# Altium PCB TDS-Meter_v1.0.PcbDoc
Units mil, origin at the board's own origin, x right, y up, seen from the top; angles counter-clockwise.
Board outline 2110 x 1060 mil, 2 copper layers (Top Layer, Bottom Layer); 33 components, 22 nets, 99 pads, 8 vias.
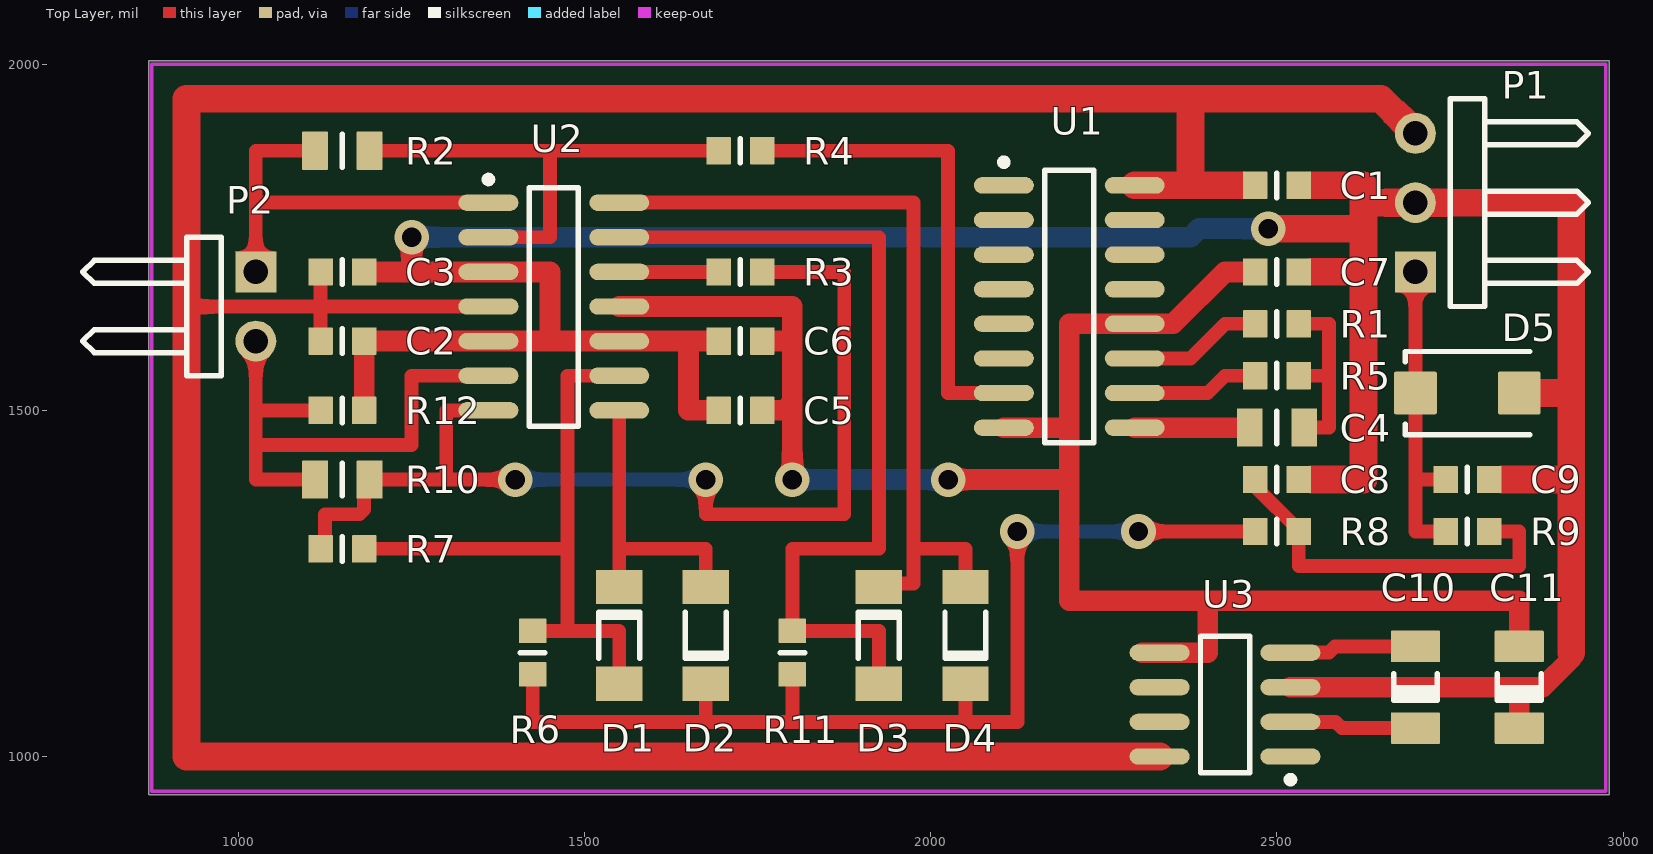
[diagram p0: Top Layer view]
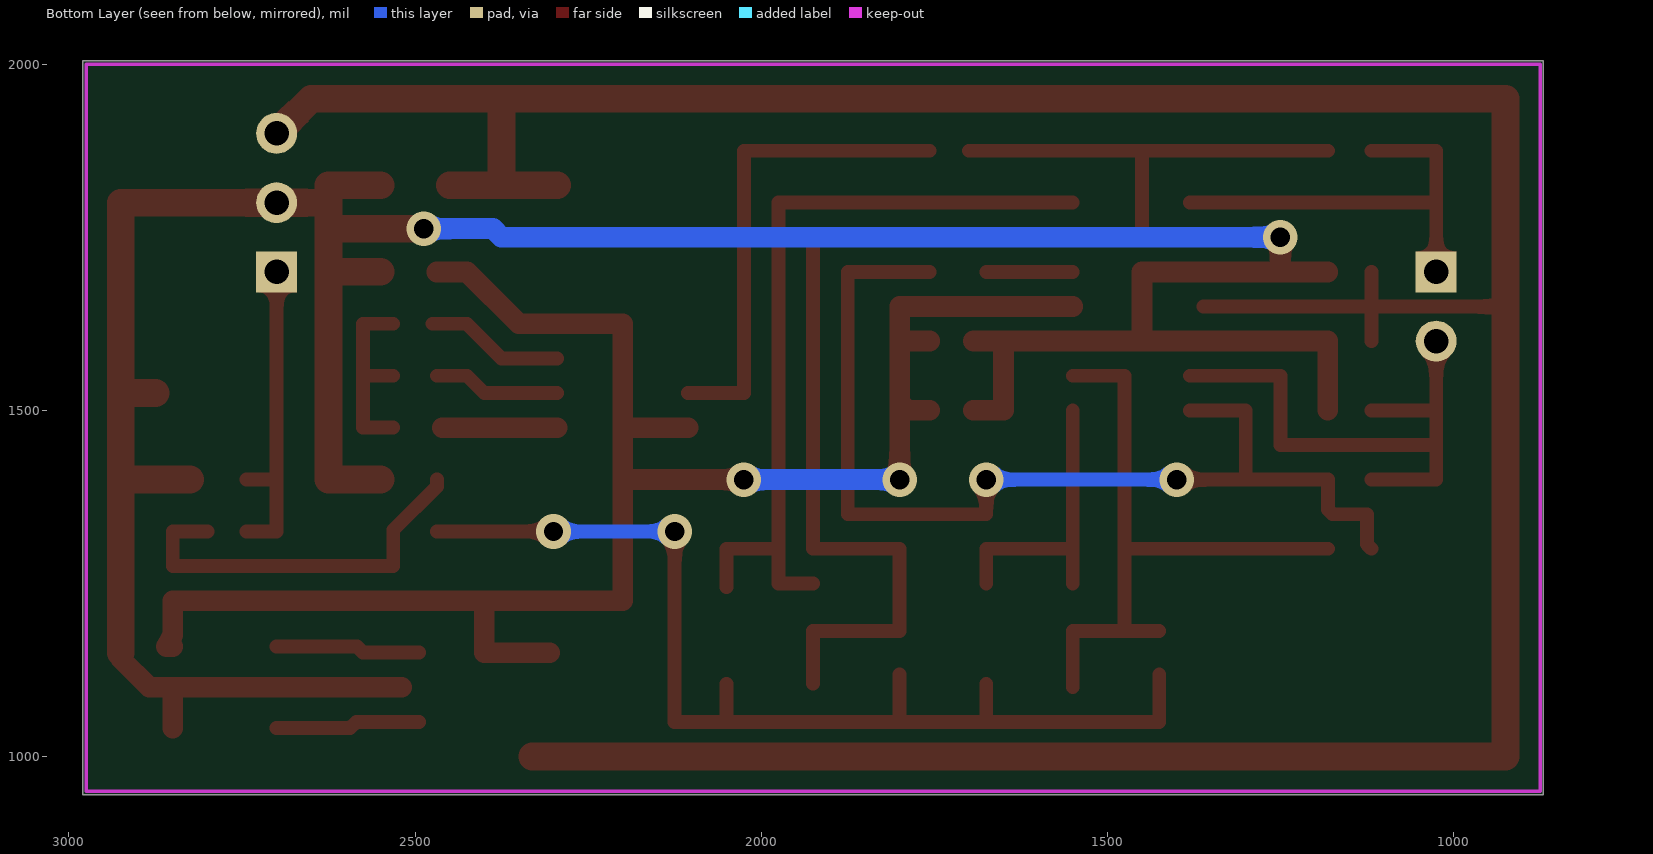
[diagram p1: Bottom Layer view, seen from below]
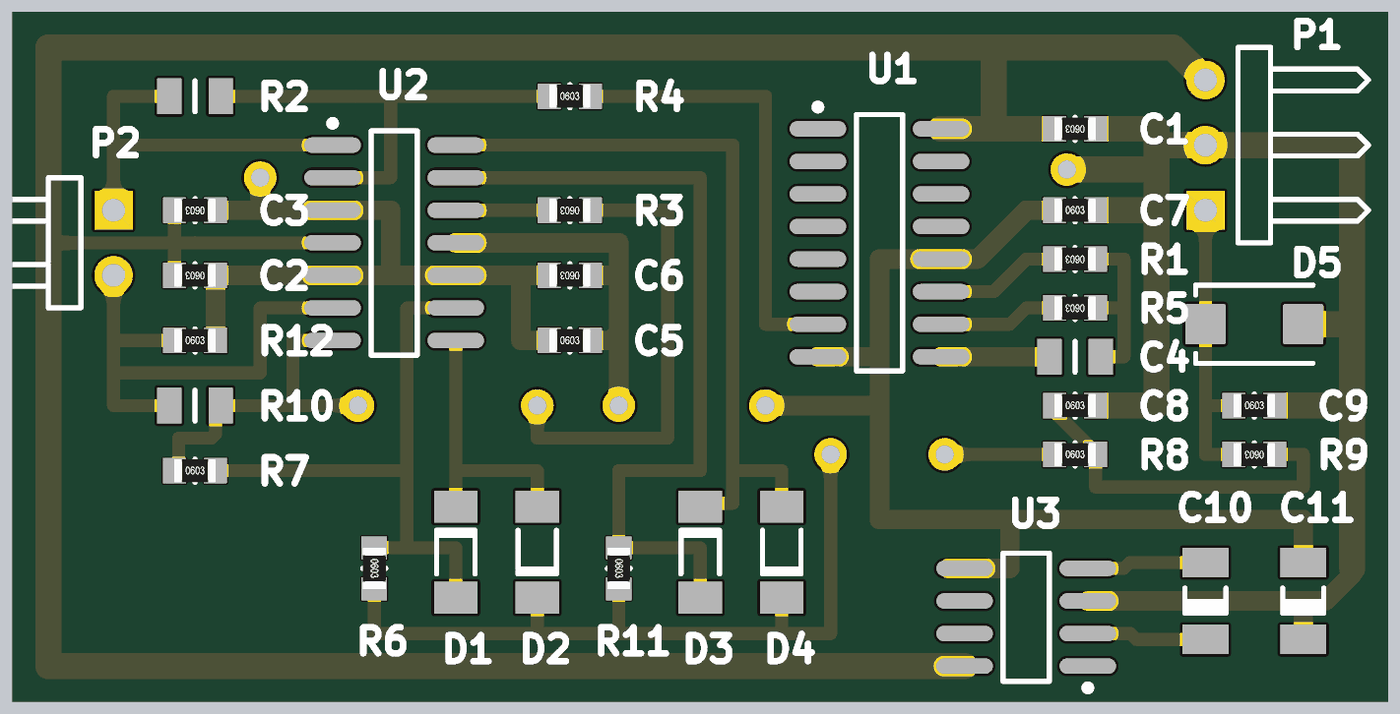
[diagram p2: 3D render of the assembled board from above, using the file's embedded part models]

## Layer stack, top to bottom
Top Solder: solder mask 0.4, Solder Resist, Dk 3.5
Top Layer: signal copper 1.4
Dielectric 1: dielectric 12.6, FR-4, Dk 4.8
Bottom Layer: signal copper 1.4
Bottom Solder: solder mask 0.4, Solder Resist, Dk 3.5

## Board outline
870,945 870,2005 2980,2005 2980,945

## Design rules (kind name [scope] priority, off if disabled: settings)
Clearance [All] p1: gap=10 ignorepadtopadclearanceinfootprint=FALSE except(0: Arc-Hole Track-Hole SMDPad-Hole THPad-Hole Via-Hole Fill-Hole Poly-Hole Region-Hole Text-Hole)
ComponentClearance [InComponent('No Component') vs InComponent('No Component')] p1: gap=10 collisioncheckmode=3 verticalgap=10 showdistances=FALSE
PolygonConnect [All] p1: connectstyle=Relief reliefconductorwidth=10 reliefentries=4 polygonreliefangle="90 Angle" airgapwidth=10
RoutingVias [All] p1: holewidth=28 width=50 viastyle="Through Hole" minholewidth=28 minwidth=50 maxholewidth=28 maxwidth=50
SolderMaskExpansion [All] p1: expansion=4
Width [All] p1: maxlimit=60 minlimit=10 preferedwidth=20
29 further rules are at their usual default settings.

## Components (designator, comment, footprint, x,y, rotation, side; value= is the part's Value field where it differs from the comment)
C1 "0.1uF" 0603 2500,1825 r180 top
C2 "4.7uF" 0603 1150,1600 r180 top
C3 "0.1uF" 0603 1150,1700 r180 top
C4 "1nF" 0805 2500,1475 r180 top
C5 "0.1uF" 0603 1725,1500 r0 top
C6 "4.7uF" 0603 1725,1600 r180 top
C7 "0.1uF" 0603 2500,1700 r0 top
C8 "1uF" 0603 2500,1400 r0 top
C9 "1uF" 0603 2775,1400 r0 top
C10 "10uF" CAPC3216x130N 2700,1100 r90 top
C11 "10uF" CAPC3216x130N 2850,1100 r90 top
D1 "DL4148" SOD80C 1550,1175 r90 top
D2 "DL4148" SOD80C 1675,1175 r270 top
D3 "DL4148" SOD80C 1925,1175 r90 top
D4 "DL4148" SOD80C 2050,1175 r270 top
D5 "¡¡DES!!" "DO214AC (SMA)" 2775,1525 r0 top value=B340A7otro
P1 "Header 3H" HDR1X3H 2700,1700 r90 top
P2 "Header 2H" HDR1X2H 1025,1700 r270 top
R1 "100K" 0603 2500,1625 r180 top
R2 "6.8K" 0805 1150,1875 r0 top
R3 "10K" 0603 1725,1700 r180 top
R4 "100K" 0603 1725,1875 r0 top
R5 "10K" 0603 2500,1550 r180 top
R6 "10K" 0603 1425,1150 r270 top
R7 "10K" 0603 1150,1300 r0 top
R8 "10K" 0603 2500,1325 r0 top
R9 "10K" 0603 2775,1325 r180 top
R10 "5.6K" 0805 1150,1400 r0 top
R11 "10K" 0603 1800,1150 r270 top
R12 "1M" 0603 1150,1500 r0 top
U1 "CD4060BM" SO-16_N 2200,1650 r0 top
U2 "LMV324" SO-14_N 1455.51,1625 r0 top
U3 "ICL7660" SO8_N 2425,1075 r180 top

## Footprints (in the part's own frame and the unit in brackets; to place one, negate y for a bottom-side part, rotate by r counter-clockwise, add the part's x,y. Pads: shape width x height; smd on the part's side, far side on the other; paste and mask are expansions set on the pad)
0603 [mm]
  rrect5% 0.9x1 smd mask+0.051: 1(-0.8,0) 2(0.8,0)
  silkscreen extent 0,-0.45 0,0.45, body extent -0.85,-0.48 0.85,0.48, height 0.55
0805 [mm]
  rrect5% 0.95x1.4 smd: 1(-1,0) 2(1,0)
  silkscreen extent 0,-0.6 0,0.6, body extent -1.07,-0.7 1.07,0.7, height 0.6
CAPC3216x130N [mm] "Chip Capacitor, Body 3.2x1.6mm, IPC Medium Density"
  rrect5% 1.15x1.8 smd: 1(-1.5,0) 2(1.5,0)
  silkscreen extent -0.48,-0.8 0.5,0.8, body extent -1.7,-0.9 1.7,0.9, height 1.3
"DO214AC (SMA)" [mil] "Molded Diode, 2-Leads, SMA"
  rrect10% 62x62 smd: 1(75,0) 2(-75,0)
  silkscreen extent -90,-60 90,60, body extent -90,-60 90,60, height 103
HDR1X2H [mm] "Connector; Header; 2 Position; Right Angle"
  rect 1.5x1.5 hole 0.9: 1(0,0)
  round 1.5 hole 0.9: 2(2.54,0)
  silkscreen extent -1.27,-6.35 3.81,-1.27
HDR1X3H [mm] "Connector; Header; 3 Position; Right Angle"
  rect 1.5x1.5 hole 0.9: 1(0,0)
  round 1.5 hole 0.9: 2(2.54,0) 3(5.08,0)
  silkscreen extent -1.27,-6.35 6.35,-1.27
SO8_N [mm] "SOIC, 8-Leads, Body 4.9x3.9mm, Pitch 1.27mm, IPC Medium Density"
  oval 2.2x0.6 smd: 1(-2.4,1.905) 2(-2.4,0.635) 3(-2.4,-0.635) 4(-2.4,-1.905) 5(2.4,-1.905) 6(2.4,-0.635) 7(2.4,0.635) 8(2.4,1.905)
  silkscreen extent -2.53,-2.5 0.9,2.88, body extent -2,-2.5 2,2.5, height 1.75
SO-14_N [mm] "SOIC, 16-Leads, Body 9.9x3.9mm, Pitch 1.27mm, IPC Medium Density"
  oval 2.2x0.6 smd: 1(-2.4,4.445) 2(-2.4,3.175) 3(-2.4,1.905) 4(-2.4,0.635) 5(-2.4,-0.635) 6(-2.4,-1.905) 7(-2.4,-3.175) 8(2.4,-3.175) 9(2.4,-1.905) 10(2.4,-0.635) 11(2.4,0.635) 12(2.4,1.905) 13(2.4,3.175) 14(2.4,4.445)
  silkscreen extent -2.52,-3.75 0.9,5.42, body extent -2,-3.75 2,5, height 1.75
SO-16_N [mm] "SOIC, 16-Leads, Body 9.9x3.9mm, Pitch 1.27mm, IPC Medium Density"
  oval 2.2x0.6 smd: 1(-2.4,4.445) 2(-2.4,3.175) 3(-2.4,1.905) 4(-2.4,0.635) 5(-2.4,-0.635) 6(-2.4,-1.905) 7(-2.4,-3.175) 8(-2.4,-4.445) 9(2.4,-4.445) 10(2.4,-3.175) 11(2.4,-1.905) 12(2.4,-0.635) 13(2.4,0.635) 14(2.4,1.905) 15(2.4,3.175) 16(2.4,4.445)
  silkscreen extent -2.52,-5 0.9,5.42, body extent -2,-5 2,5, height 1.75
SOD80C [mm] "Metal Electrode Face (MELF) Diode; Body 3.5 x 1.6 mm (LxDia)"
  rect 1.25x1.7 smd: 1(-1.775,0) 2(1.775,0)
  silkscreen extent -0.85,-0.75 0.85,0.75

## Part data
C1 C2 C3 C4 C5 C6 C8 C9: library part Cap, "Cap", Package=0603, Tolerance=±10%, Voltage-Rated=6.3V
C7: library part Cap, "Cap", Package=0603, Tolerance=±10%, Voltage-Rated=50V
C10 C11: library part "Cap Pol", "Cap", Current="90 mARMS", Manufacturer=Panasonic, MfgPartNum=EEE-FC1H220P, Package="8mm dia.", Tolerance=±10%, Voltage-Rated=50V, 3rdMfgr="Vishay / MAL214097103E3"
D1 D2 D3 D4: "Smal signal diode"
D5: library part B340A, "SURFACE MOUNT SCHOTTKY BARRIER RECTIFIER 1N5829. Pueden ir varios de los de sech", Package="DO214AA (SMB)", Voltage-Rated=40V
P1: "Header, 3-Pin, Right Angle", LatestRevisionDate=17-Jul-2002, LatestRevisionNote="Re-released for DXP Platform.", Publisher="Altium Limited"
P2: "Header, 2-Pin, Right Angle", LatestRevisionDate=17-Jul-2002, LatestRevisionNote="Re-released for DXP Platform.", Publisher="Altium Limited"
R1 R2 R3 R4 R5 R6 R7 R8 R9 R10 R11 R12: library part Res, "Resistor", Package=0603, Tolerance=1%
U1: library part CD4060, "IC Counter Binary Counter Element Bit Negative Edge 16-SOIC"
U2: "General Purpose Amplifier Circuit Rail-to-Rail 14-SOIC"
U3: "CMOS Voltage Converters, from positive to negative for an input range of +1.5V to +10.0V"

## Via types
v1: diameter 50, hole 28, Top Layer to Bottom Layer, 8 vias

## Nets (pads, with @x,y where several pads share a name; then routed paths per layer and width w, separated by ;. In a path a pad name is that pad's centre, name@x,y a point inside that pad or via, vN(x,y) a via of type N, cw(c..) or ccw(c..) an arc to the next point about the centre after c; other vN are vias at no path point)
+3.3v: C1.2 C2.2 C3.2 P1.3 U1.16 U2.4 U3.8 | length 4968.1
  Top Layer w20: 925,1650 1118.5,1650 ; C2.2 1118.5,1650 ; C3.2 1118.5,1650 ; 1150.24,1650.24 1150,1650 ; U2.4 1150,1650 ; 1118.5,1650 1150,1650
  Top Layer w40: U1.16 2375,1825 ; U3.8 925,1000 925,1650 925,1950 2375,1950 ; 2450,1825 2375,1825 ; P1.3 2650,1950 2375,1950 ; 2375,1825 2375,1950
-3.3v: C5.2 C6.1 C7.1 C11.2 U1.8 U1.12 U2.11 U3.5 | length 2699.9
  Top Layer w30: U2.11 1800,1650 1800,1600 ; C5.2 1788.25,1500 1800,1511.75 ; C6.1 1800,1600 ; v1(1800,1400) 1800,1511.75 ; v1@2030,1395 2025,1390 v1(2025,1400) 2200,1400 ; U1.8 2200,1475 ; U3.5@2305.51,1150 U3.5 2400,1150 2400,1225 ; C7.1 2425,1700 2350,1625 U1.12 2200,1625 2200,1475 ; C11.2 2859.06,1159.06 2856.85,1162.94 2850,1175 2850,1200 2850,1225 2400,1225 ; 1800,1511.75 1800,1600 ; 2200,1400 2200,1225 2400,1225 ; 2200,1400 2200,1475
  Bottom Layer w30: v1(1800,1400) v1(2025,1400)
GND: C1.1 C2.1 C3.1 C5.1 C6.2 C7.2 C8.2 C9.2 C11.1 D5.1 P1.2 R12.2 U2.3 U2.5 U2.10 U3.3 | length 4789.1
  Top Layer w30: R12.2 C2.1 U2.5 U2.5@1375,1600 ; C3.1 1250,1700 ; v1(1250,1750) 1250,1700 ; U2.5@1380.51,1600 1450,1600 ; C5.1 1650,1500 1650,1600 ; C6.2 1650,1600 ; U3.3 2850,1100 ; C11.1 2850,1100 ; 2925,1150 2925,1141.29 2883.71,1100 2850,1100 ; 1250,1700 U2.3 1450,1700 1450,1600 ; 1450,1600 U2.10 1650,1600
  Top Layer w40: v1(2487.5,1762.5) 2625,1762.5 ; 2550,1400 2625,1400 2625,1700 ; 2550,1700 2625,1700 ; 2550,1825 2625,1825 2625,1800 ; 2825,1400 2925,1400 ; D5.1@2875,1525 2925,1525 ; 2925,1150 2925,1400 ; 2625,1700 2625,1762.5 ; 2625,1762.5 2625,1800 ; 2625,1800 P1.2 2925,1800 2925,1525 ; 2925,1400 2925,1525
  Bottom Layer w30: v1(1250,1750) 2375,1750 2387.5,1762.5 v1(2487.5,1762.5)
NetC4_1: C4.1 R1.1 R5.1 | length 280.5
  Top Layer w20: C4.1@2531.5,1475 2575,1475 2575,1550 ; R5.1 2575,1550 ; R1.1 2575,1625 2575,1550
NetC4_2: C4.2 U1.9 | length 166.1
  Top Layer w30: U1.9 C4.2
NetC8_1: C8.1 R8.2 R9.1 | length 569.6
  Top Layer w20: C8.1 2468.5,1390.17 2531.5,1327.17 R8.2 2531.5,1275 2850,1275 2850,1325 R9.1@2800,1325
NetC9_1: C9.1 D5.2 P1.1 R9.2 | length 505.5
  Top Layer w20: P1.1 D5.2 2700,1443.5 ; R9.2 2700,1325 2700,1400 ; C9.1 2700,1400 ; 2700,1400 2700,1443.5 ; 2700,1400 2700,1443.5
NetC10_1: C10.1 U3.2 | length 209.3
  Top Layer w20: U3.2@2494.49,1050 2584.74,1050 2593.8,1040.94 C10.1
NetC10_2: C10.2 U3.4 | length 209.3
  Top Layer w20: U3.4@2494.49,1150 2575,1150 2584.06,1159.06 C10.2
NetD1_1: D1.1 R6.1 R7.2 U2.9 | length 943.5
  Top Layer w20: R7.2 1475,1300 ; R6.1 1475,1181.5 ; D1.1@1550,1100 D1.1 1550,1181.5 1475,1181.5 ; U2.9 1475,1550 1475,1300 ; 1475,1181.5 1475,1300
NetD1_2: D1.2 D2.1 U2.8 | length 425
  Top Layer w20: D1.2@1550,1250 1550,1300 ; U2.8 1550,1300 ; D2.1@1675,1250 1675,1300 1550,1300
NetD2_2: D2.2 D4.2 R6.2 R8.1 R11.2 | length 1565.7
  Top Layer w20: R6.2 1425,1050 1675,1050 ; D2.2 1675,1050 ; R11.2 1800,1050 ; D4.2 2050,1050 ; v1(2125,1325) 2125,1050 2050,1050 ; v1(2300,1325) R8.1 ; 1675,1050 1800,1050 ; 1800,1050 2050,1050
  Bottom Layer w20: v1(2125,1325) v1(2300,1325)
NetD3_1: D3.1 R11.1 U2.13 | length 1269.9
  Top Layer w20: U2.13 1925,1750 1925,1300 1800,1300 R11.1 1925,1181.5 D3.1
NetD3_2: D3.2 D4.1 U2.14 | length 1155.1
  Top Layer w20: U2.14 1975,1800 1975,1300 ; D3.2@1925,1250 1975,1250 1975,1300 ; D4.1 2050,1300 1975,1300
NetP2_1: P2.1 R2.1 U2.1 | length 599
  Top Layer w20: P2.1@1025,1725 1025,1800 ; R2.1@1118.5,1875 1025,1875 1025,1800 ; U2.1@1380.51,1800 U2.1 1025,1800
NetP2_2: P2.2 R10.1 R12.1 U2.6 | length 842.5
  Top Layer w20: P2.2 1025,1500 ; R10.1@1118.5,1400 1025,1400 1025,1450 ; R12.1 1025,1500 ; U2.6@1380.51,1550 U2.6 1250,1550 1250,1450 1025,1450 ; 1025,1450 1025,1500
NetR1_2: R1.2 U1.11 | length 201.2
  Top Layer w20: U1.11 2375,1575 2425,1625 R1.2 R1.2@2475,1625
NetR2_2: R2.2 R4.1 U2.2 | length 713
  Top Layer w20: R2.2@1181.5,1875 1450,1875 ; U2.2@1380.51,1750 1450,1750 1450,1875 ; R4.1@1700,1875 R4.1 1450,1875
NetR3_1: R3.1 R7.1 R10.2 U2.7 | length 1547.9
  Top Layer w20: R7.1 1125,1306.5 1125,1350 1175,1350 1181.5,1356.5 1181.5,1400 1300,1400 ; U2.7@1380.51,1500 U2.7 1300,1500 1300,1400 ; v1(1400,1400) 1300,1400 ; v1(1675,1400) 1675,1350 1875,1350 1875,1700 R3.1
  Bottom Layer w20: v1(1400,1400) v1(1675,1400)
NetR3_2: R3.2 U2.12 | length 125
  Top Layer w20: U2.12 1675,1700
NetR4_2: R4.2 U1.7 | length 699
  Top Layer w20: R4.2 2025,1875 2025,1525 U1.7
NetR5_2: R5.2 U1.10 | length 184.4
  Top Layer w20: U1.10 2400,1525 2425,1550 R5.2
pads on no net: U1.1 U1.2 U1.3 U1.4 U1.5 U1.6 U1.13 U1.14 U1.15 U3.1 U3.6 U3.7

## Keep-outs
Keep-Out Layer:
  lines w5: 875,950 875,2000 2975,2000 2975,950 875,950

## Silkscreen, mask and mechanical layers (free items; w line width, h text height)
Mechanical 1:
  the board outline again, w5